# Altium PCB XPCAM-C_1V4.PCBDOC (part 1 of 2)
Units mil, origin at the board's own origin, x right, y up, seen from the top; angles counter-clockwise.
Board outline 1696.85 x 1007.87 mil, 6 copper layers (Top Layer, Internal Plane 1, Mid-Layer 1, Internal Plane 2, Mid-Layer 2, Bottom Layer); 49 components, 33 nets, 261 pads, 143 vias.
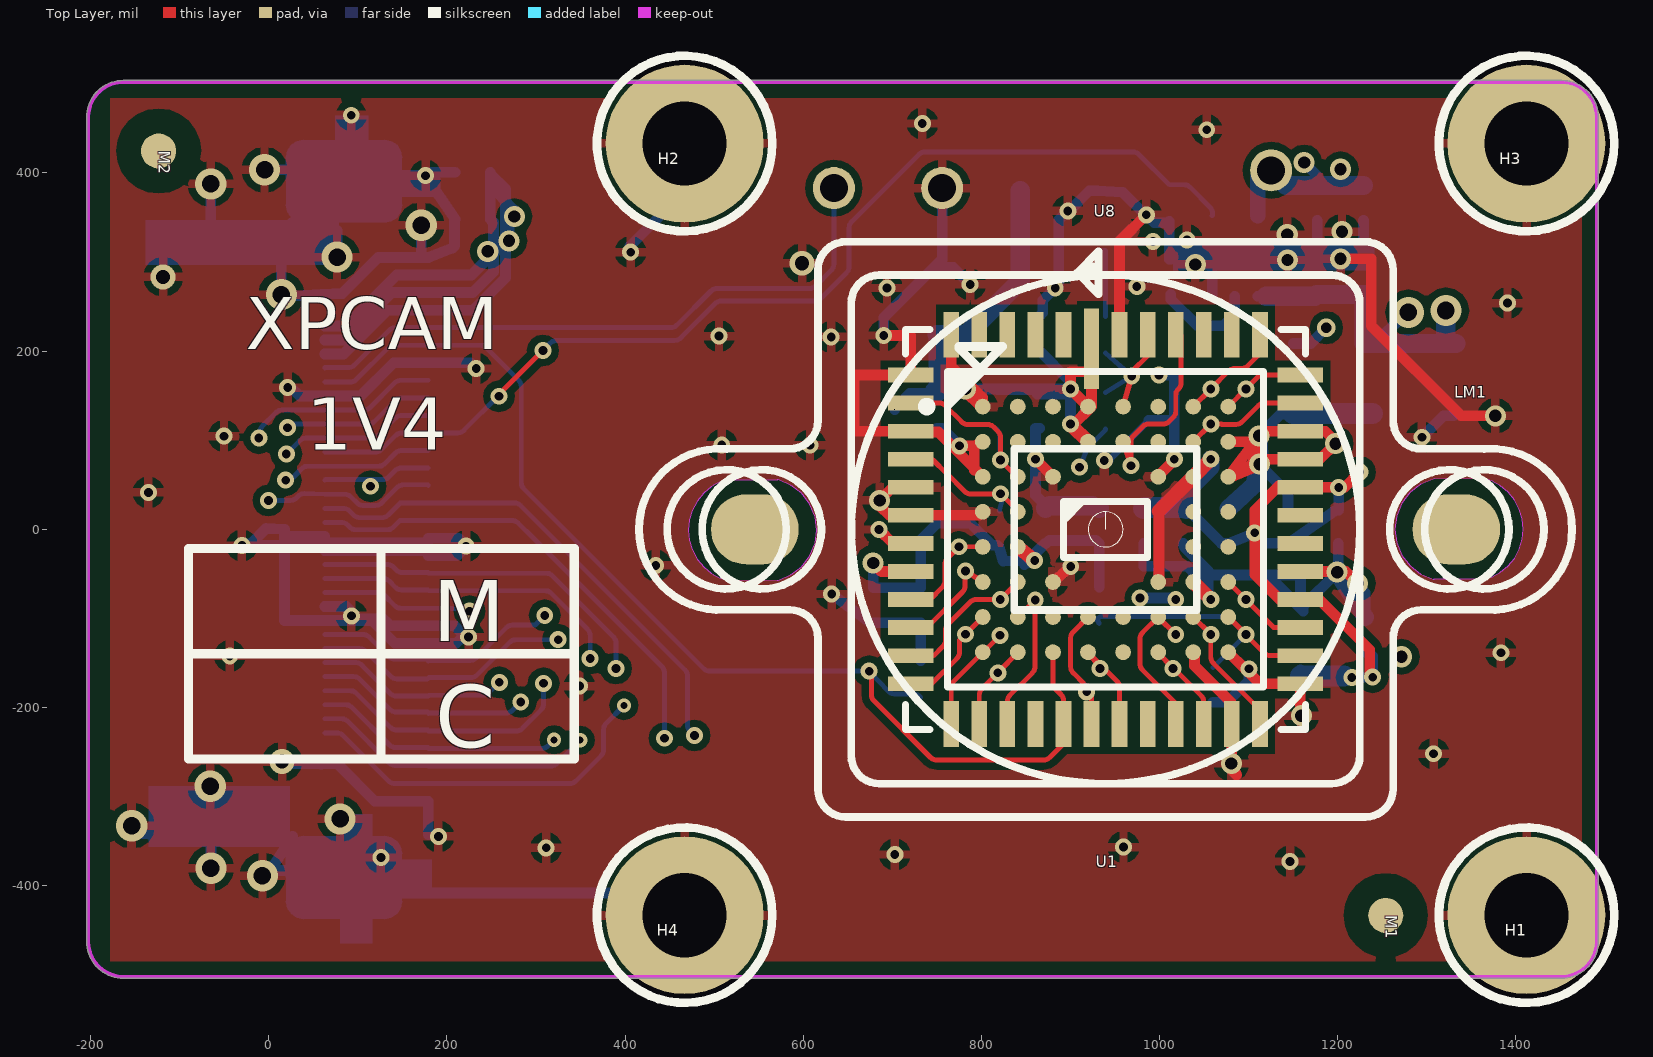
[diagram p0: Top Layer view]
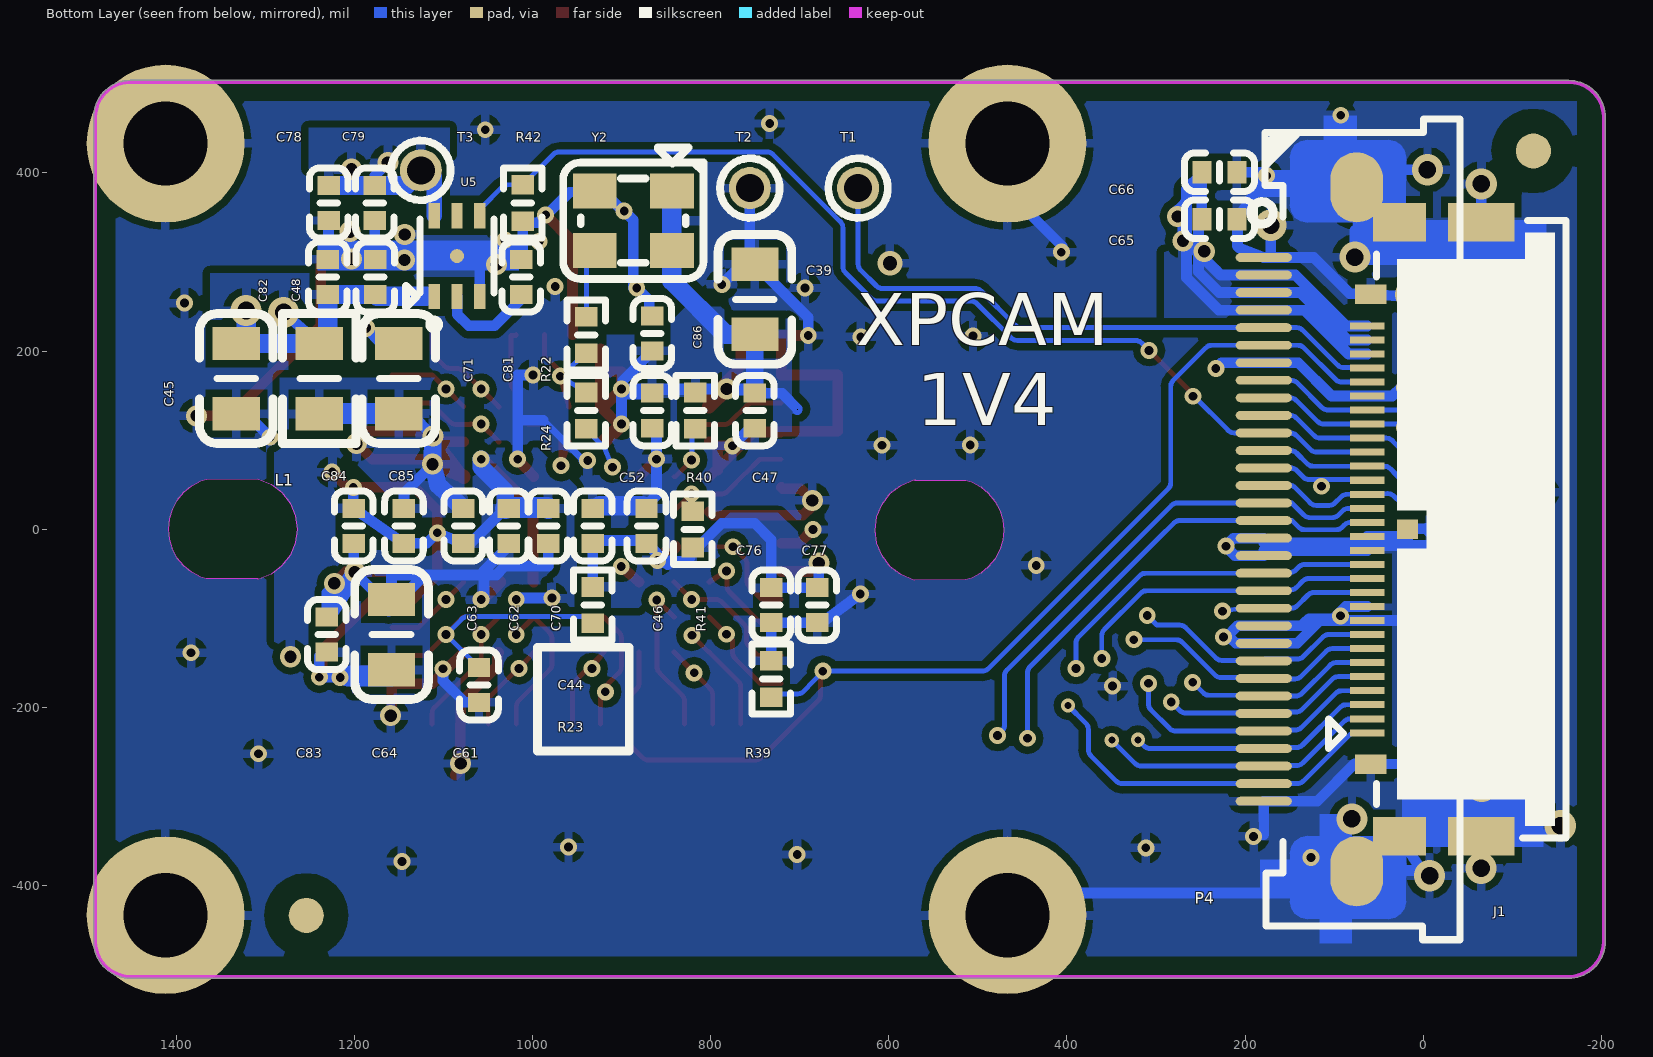
[diagram p1: Bottom Layer view, seen from below]
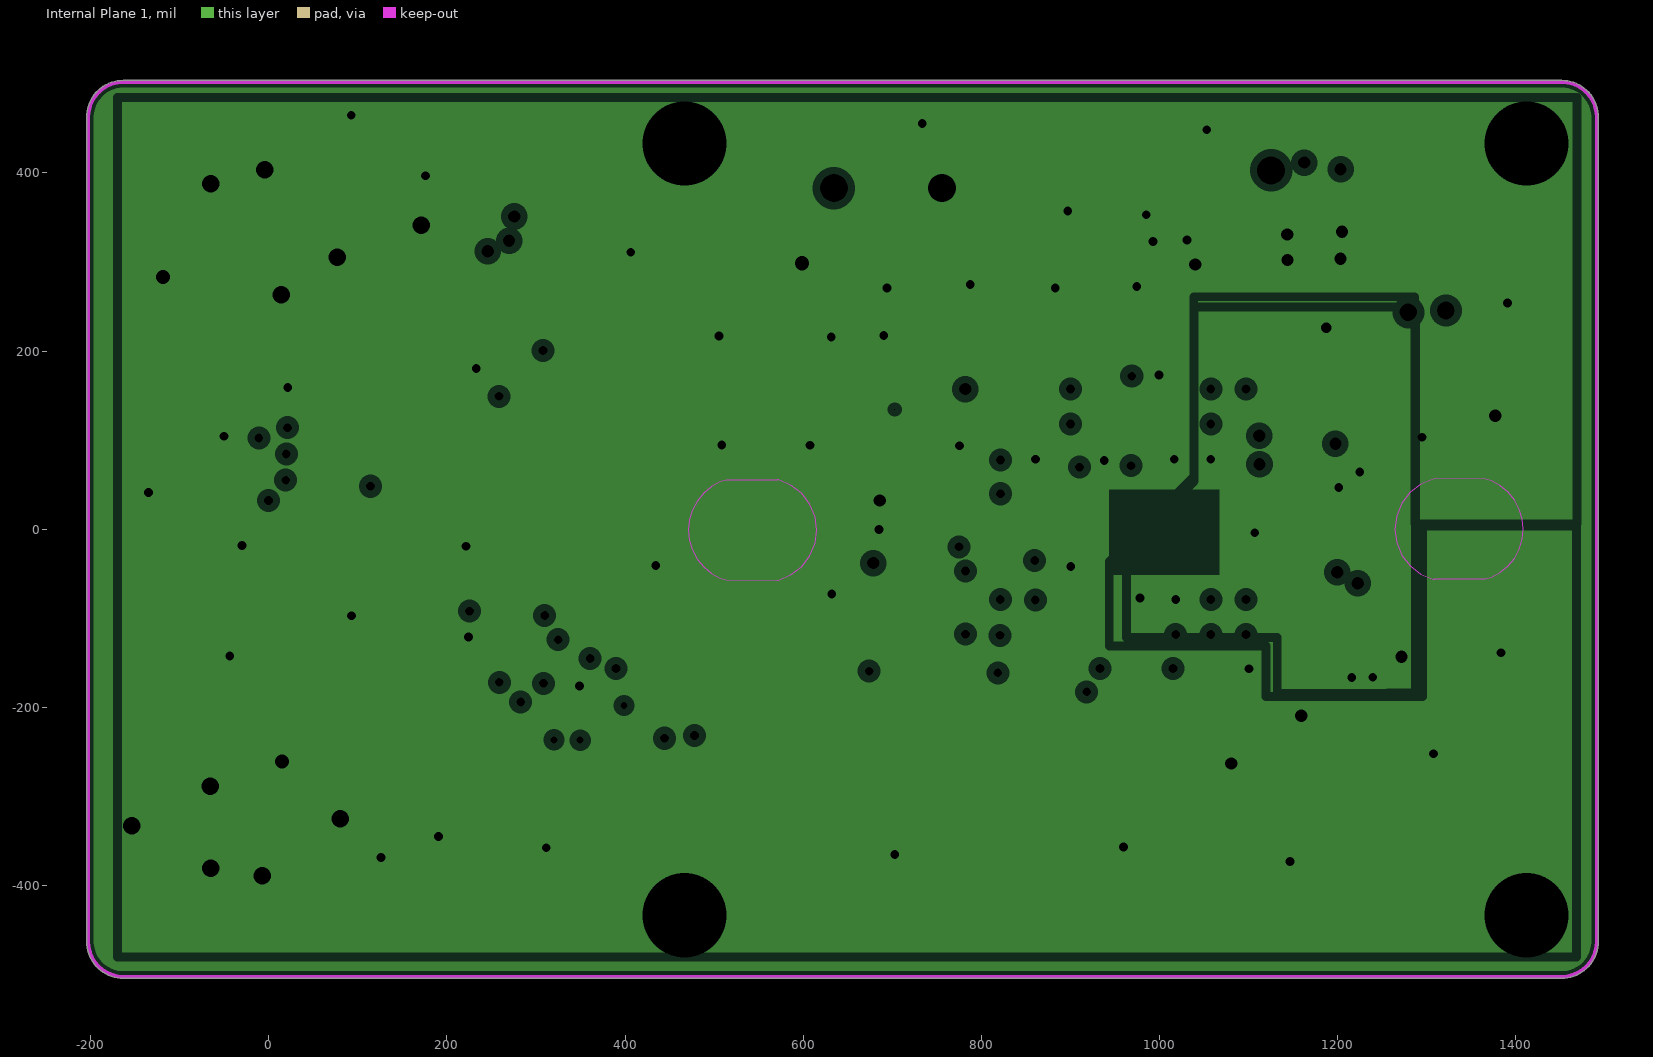
[diagram p2: Internal Plane 1, clearances drawn from the general rule]
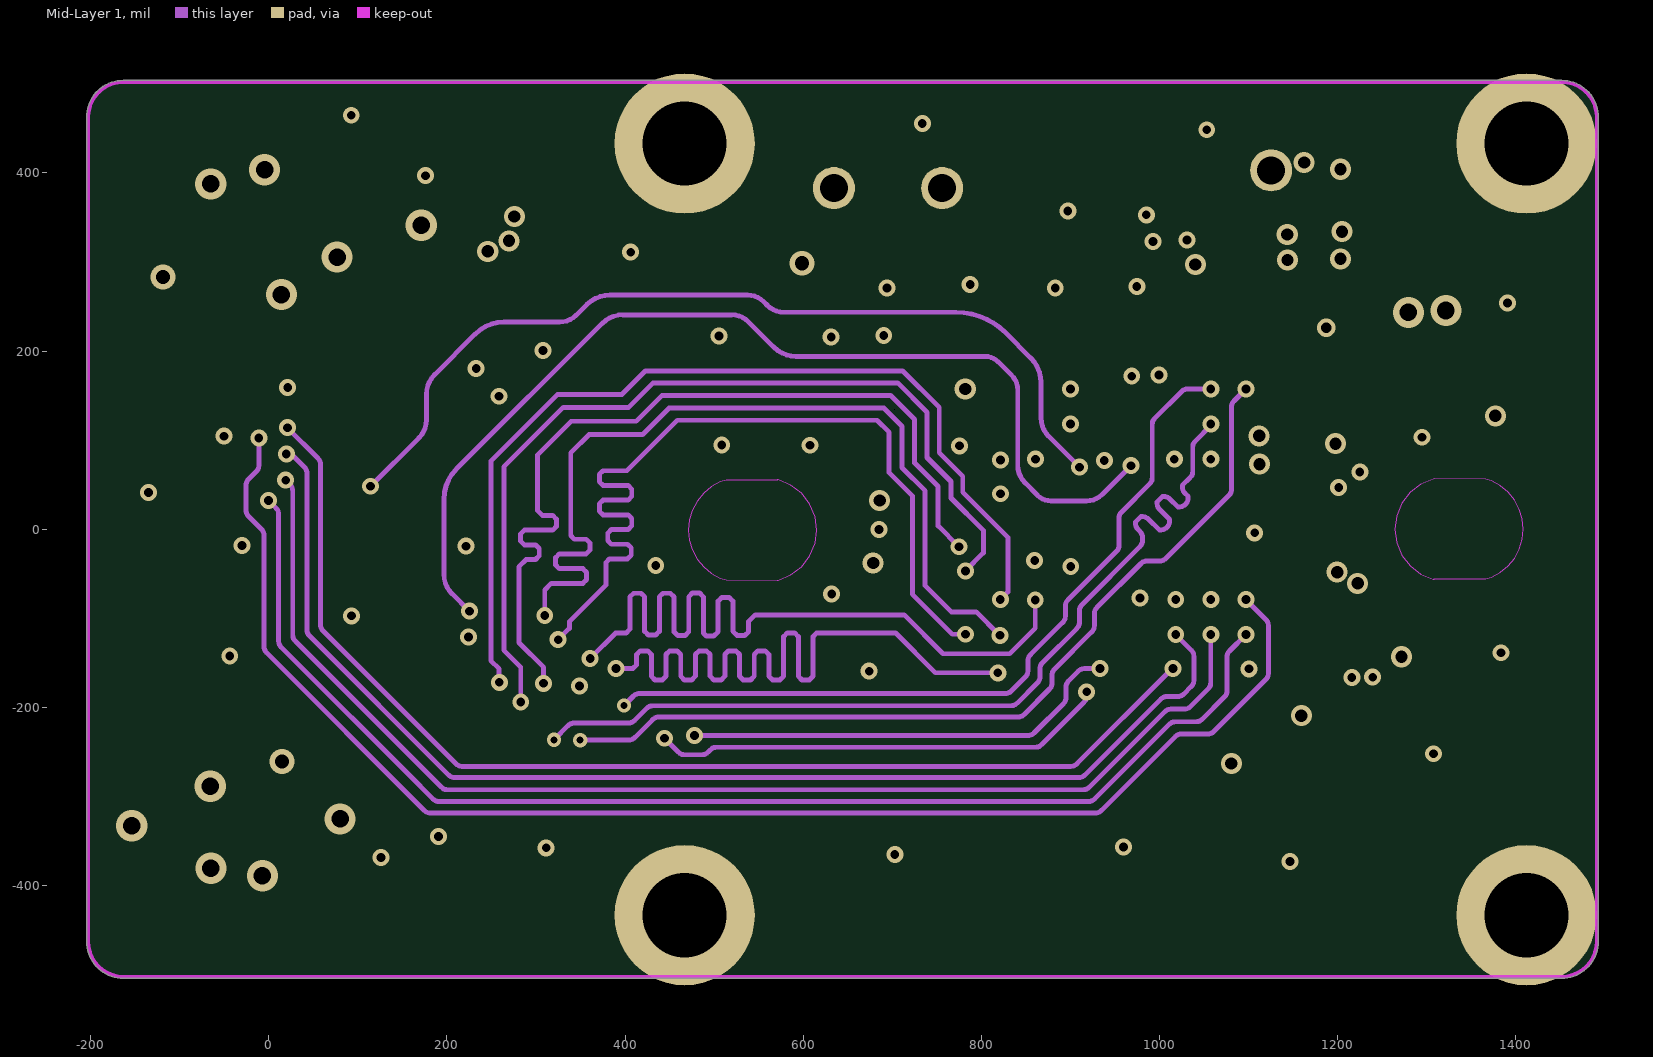
[diagram p3: Mid-Layer 1]
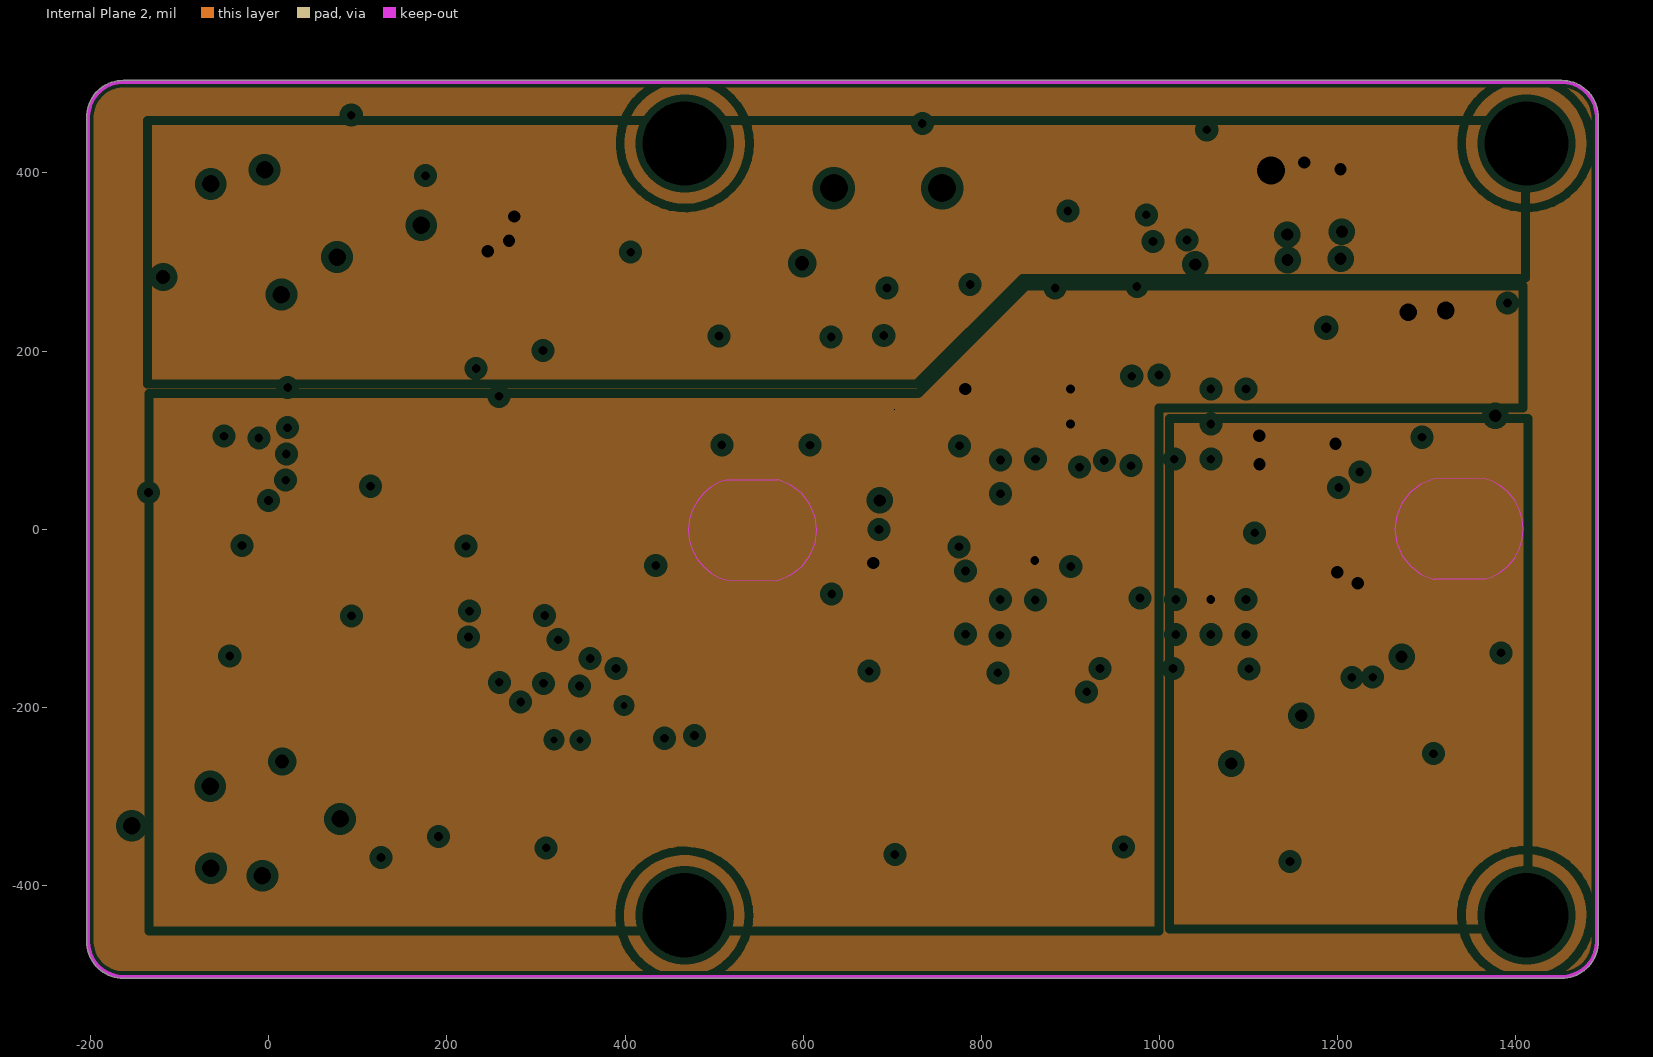
[diagram p4: Internal Plane 2, clearances drawn from the general rule]
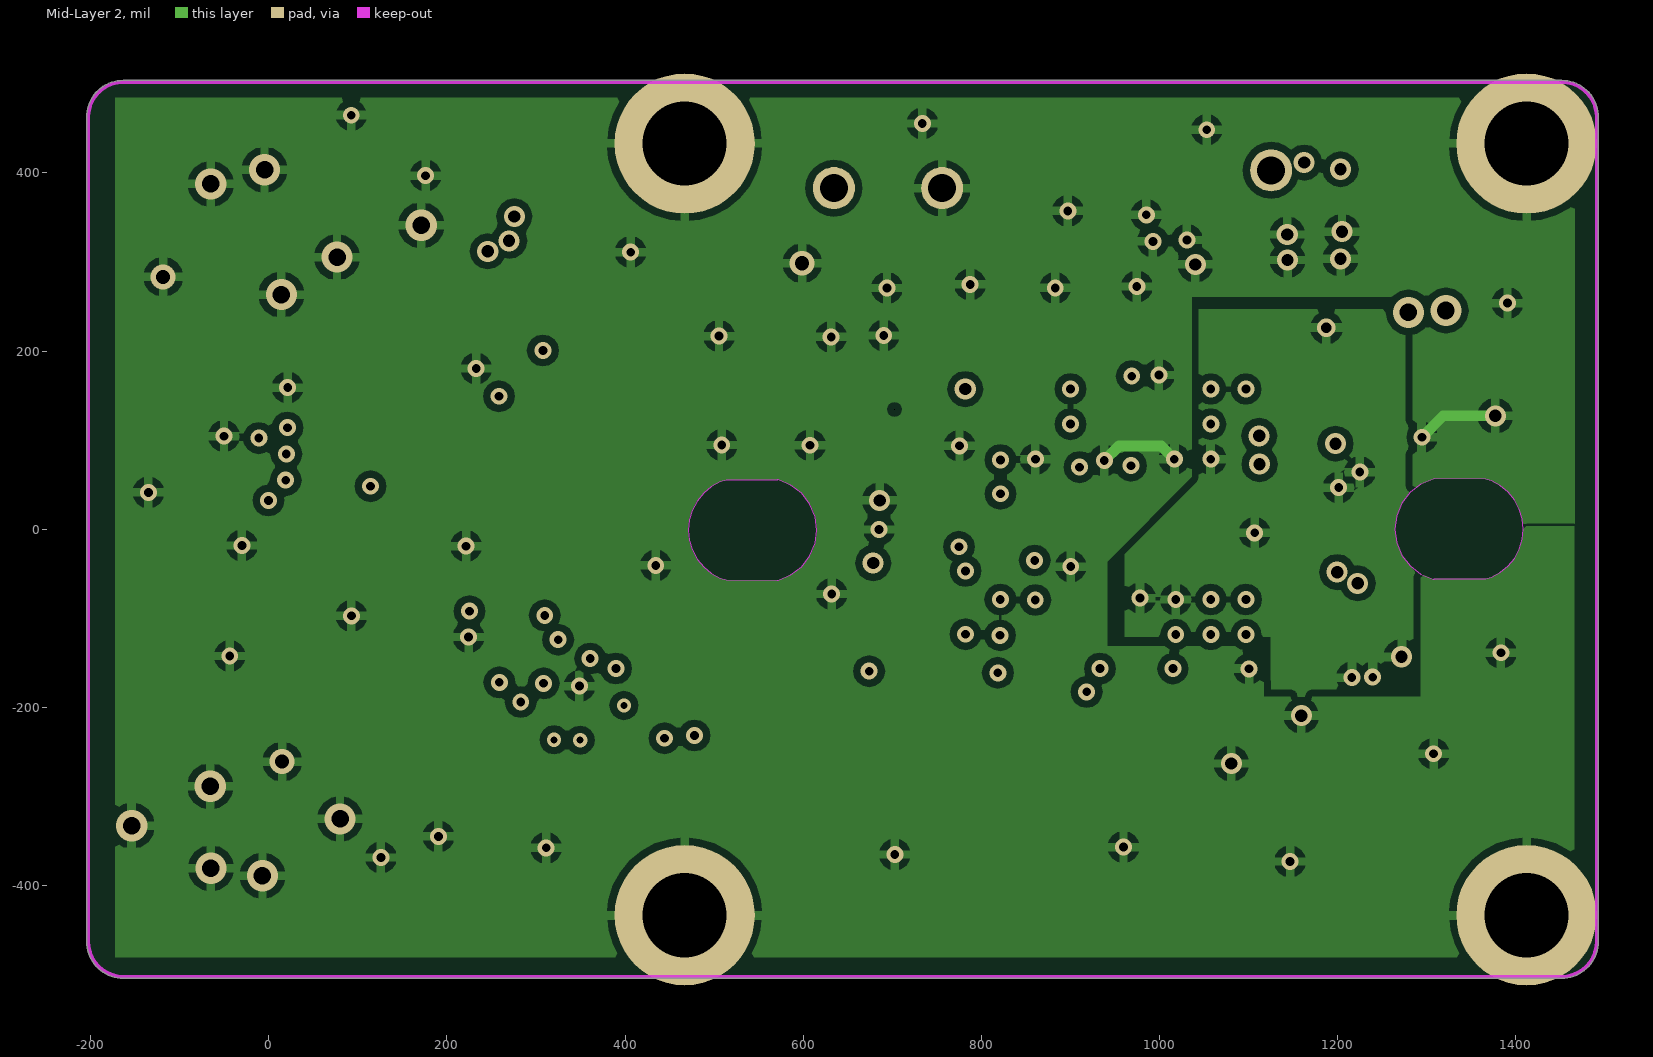
[diagram p5: Mid-Layer 2]

## Layer stack, top to bottom
Top Layer: signal copper 1.4
Dielectric: dielectric 12.6, FR-4, Dk 4.8
Internal Plane 1: plane copper 1.4, net (Multiple Nets)
Dielectric: dielectric 12.6, FR-4, Dk 4.8
Mid-Layer 1: signal copper 1.4
Dielectric: dielectric 12.6, FR-4, Dk 4.8
Internal Plane 2: plane copper 1.4, net (Multiple Nets)
Dielectric: dielectric 12.6, FR-4, Dk 4.8
Mid-Layer 2: signal copper 1.4
Dielectric: dielectric 12.6, FR-4, Dk 4.8
Bottom Layer: signal copper 1.4

## Board outline
-204.32,-462.6 ccw(c-162.98,-462.6) -162.98,-503.94 1451.19,-503.94 ccw(c1451.19,-462.6) 1492.53,-462.6 1492.53,462.6 ccw(c1451.19,462.6) 1451.19,503.94 -162.96,503.94 -162.98,503.94 ccw(c-162.98,462.6) -204.32,462.6

## Design rules (kind name [scope] priority, off if disabled: settings)
Clearance "'Default' PADS rule_9" [All] p1: gap=8
Clearance "'Default' PADS rule_8" [InPolygon vs InPolygon] p2: gap=8
Clearance "'Default' PADS rule_7" [All] p3: gap=5.5
Clearance "'Default' PADS rule_4" [IsVia vs IsVia] p4: gap=6
ComponentClearance "'Default' PADS rule" [All] p1: gap=10 collisioncheckmode=3 verticalgap=10 showdistances=FALSE
PlaneClearance "'Default' PADS rule_3" [All] p1: clearance=8
PlaneConnect "Power Plane Connect Style - pads with no thermal" [(Name='J1-31') Or (Name='J1-32') Or (Name='M1-1') Or (Name='M2-1')] p1: planeconnectstyle=NoConnect reliefexpansion=20 reliefentries=4 reliefconductorwidth=10 reliefairgap=10 // PAD - No Thermal Connect Rule
PlaneConnect "Power Plane Connect Style - from global settings" [All] p2: planeconnectstyle=Relief reliefexpansion=20 reliefentries=2 reliefconductorwidth=11.81 reliefairgap=10
PolygonConnect [All] p1: connectstyle=Relief reliefconductorwidth=10 reliefentries=4 polygonreliefangle="90 Angle"
RoutingVias [All] p1: holewidth=28 width=50 viastyle="Through Hole" minholewidth=28 minwidth=50 maxholewidth=28 maxwidth=50
SMDToCorner "'Default' PADS rule_5" [All] p1: distance=60000
SMDToPlane "'Default' PADS rule_6" [All] p1: distance=60000
SilkscreenOverComponentPads [All] p1: minsilkscreentomaskgap=10
SolderMaskExpansion [All] p1: expansion=4
Width "'Default' PADS rule_2" [All] p1: maxlimit=250 minlimit=5 preferedwidth=5.6
24 further rules are at their usual default settings.

## Components (designator, comment, footprint, x,y, rotation, side; value= is the part's Value field where it differs from the comment)
C39 "0805C" 0805C 750.25,258.19 r270 bottom
C44 "0402C_L" 0402C_L 932.28,3.87 r270 bottom
C45 "0805C" 0805C 1332.36,169.29 r90 bottom
C46 "0402C_L" 0402C_L 871.95,3.87 r270 bottom
C47 "0402C_L" 0402C_L 750.25,133.2 r90 bottom
C48 "0402C_L" 0402C_L 1176.24,283.34 r270 bottom
C52 "0402C_L" 0402C_L 865.38,133.2 r90 bottom
C61 "0402C_L" 0402C_L 1059.99,-174.53 r90 bottom
C62 "0402C_L" 0402C_L 1026.67,3.82 r270 bottom
C63 "0402C_L" 0402C_L 1077.5,3.82 r90 bottom
C64 "0805C" 0805C 1158.14,-118.11 r90 bottom
C65 "0402C_L" 0402C_L 228.95,348.23 r0 bottom
C66 "0402C_L" 0402C_L 228.95,400.96 r0 bottom
C70 "0402C_L" 0402C_L 982.27,3.82 r270 bottom
C71 "0805C" 0805C 1150.01,169.29 r270 bottom
C76 "0402C_L" 0402C_L 731.88,-85.1 r270 bottom
C77 "0402C_L" 0402C_L 680.46,-85.1 r90 bottom
C78 "0402C_L" 0402C_L 1228.82,366.31 r90 bottom
C79 "0402C_L" 0402C_L 1177.06,366.31 r90 bottom
C81 "0402C_L" 0402C_L 1012.72,283.34 r270 bottom
C82 "0402C_L" 0402C_L 1229.64,283.34 r270 bottom
C83 "0402C_L" 0402C_L 1230.87,-118.11 r90 bottom
C84 "0402C_L" 0402C_L 1200.69,3.82 r270 bottom
C85 "0402C_L" 0402C_L 1144.2,3.82 r90 bottom
C86 "0402C_L" 0402C_L 865.38,219.88 r270 bottom
H1 "PAD_M3_D350_450" PAD_M3_D350_450 1411.82,-433.07 r0 top
H2 "PAD_M3_D350_450" PAD_M3_D350_450 466.94,433.07 r0 top
H3 "PAD_M3_D350_450" PAD_M3_D350_450 1411.82,433.07 r0 top
H4 "PAD_M3_D350_450" PAD_M3_D350_450 466.94,-433.07 r0 top
J1 "HSA30_P40L196W42H10_20525" HSA30_P40L196W42H10_20525 0,0 r90 bottom
L1 "0805R" 0805R 1239.21,169.29 r270 bottom
LM1 "LEMS_P20_M12" LEMS_P20_M12 939.38,0 r0 top
M1 "PAD_MARK_D1-2" PAD_MARK_D1-2 1253.84,-433.37 r270 top
M2 "PAD_MARK_D1-2" PAD_MARK_D1-2 -123.48,424.68 r270 top
P4 "HS32A_FPC_P50L2350W480H210" HS32A_FPC_P50L2350W480H210 157.48,0 r90 bottom
R22 "0402R_L" 0402R_L 939.38,218.21 r90 bottom
R23 "0402R_L" 0402R_L 932.28,-85.1 r90 bottom
R24 "0402R_L" 0402R_L 939.38,133.2 r270 bottom
R39 "0402R_L" 0402R_L 731.88,-168.1 r90 bottom
R40 "0402R_L" 0402R_L 817.28,133.2 r90 bottom
R41 "0402R_L" 0402R_L 820.15,0.05 r270 bottom
R42 "0402R_L" 0402R_L 1010.86,366.31 r90 bottom
T1 "PAD_TP_D1.2" PAD_TP_D1.2 634.44,383.03 r180 bottom
T2 "PAD_TP_D1.2" PAD_TP_D1.2 755.95,383.03 r180 bottom
T3 "PAD_TP_D1.2" PAD_TP_D1.2 1125.24,402.95 r180 bottom
U1 "IBGA52_8X8_P100L90W90H90R" IBGA52_8X8_P100L90W90H90R 939.38,0 r0 top
U5 "SON6_P65L21W21H8_DRV" SON6_P65L21W21H8_DRV 1084.64,306.77 r90 bottom
U8 "CLCC48_P80L114W114H23" CLCC48_P80L114W114H23 939.38,0 r0 top
Y2 "XTAL_3225" XTAL_3225 886.81,346.46 r0 bottom

## Footprints (in the part's own frame and the unit in brackets; to place one, negate y for a bottom-side part, rotate by r counter-clockwise, add the part's x,y. Pads: shape width x height; smd on the part's side, far side on the other; paste and mask are expansions set on the pad)
0402C_L [mm]
  rect 0.54x0.64 smd: 1(-0.5,0) 2(0.5,0)
  silkscreen extent -1,-0.55 1,0.55
0402R_L [mm]
  rect 0.56x0.64 smd: 1(-0.52,0) 2(0.52,0)
  silkscreen extent -1,-0.55 1,0.55
0805C [mm]
  rect 0.95x1.35 smd: 1(-1,0) 2(1,0)
  silkscreen extent -1.85,-1.05 1.85,1.05
0805R [mm]
  rect 0.95x1.35 smd: 1(-1,0) 2(1,0)
  silkscreen extent -1.85,-1.05 1.85,1.05
CLCC48_P80L114W114H23 [mm]
  rect 0.42x2.3 smd: 1(-0.4,5.15)
  rect 0.45x1.3 smd paste-0.015: 2(-1.2,5.55) 3(-2,5.55) 4(-2.8,5.55) 5(-3.6,5.55) 6(-4.4,5.55) 19(-4.4,-5.55) 20(-3.6,-5.55) 21(-2.8,-5.55) 22(-2,-5.55) 23(-1.2,-5.55) 24(-0.4,-5.55) 25(0.4,-5.55) 26(1.2,-5.55) 27(2,-5.55) 28(2.8,-5.55) 29(3.6,-5.55) 30(4.4,-5.55) 43(4.4,5.55) 44(3.6,5.55) 45(2.8,5.55) 46(2,5.55) 47(1.2,5.55) 48(0.4,5.55)
  rect 1.3x0.42 smd: 7(-5.55,4.4) 8(-5.55,3.6) 9(-5.55,2.8) 10(-5.55,2) 11(-5.55,1.2) 12(-5.55,0.4) 13(-5.55,-0.4) 14(-5.55,-1.2) 15(-5.55,-2) 16(-5.55,-2.8) 17(-5.55,-3.6) 18(-5.55,-4.4) 31(5.55,-4.4) 32(5.55,-3.6) 33(5.55,-2.8) 34(5.55,-2) 35(5.55,-1.2) 36(5.55,-0.4) 37(5.55,0.4) 38(5.55,1.2) 39(5.55,2) 40(5.55,2.8) 41(5.55,3.6) 42(5.55,4.4)
  silkscreen extent -5.7,-5.7 5.7,7.92
HS32A_FPC_P50L2350W480H210 [mm]
  oval 0.254x1.6 smd: 1(7.75,0.55) 2(7.25,0.55) 3(6.75,0.55) 4(6.25,0.55) 5(5.75,0.55) 6(5.25,0.55) 7(4.75,0.55) 8(4.25,0.55) 9(3.75,0.55) 10(3.25,0.55) 11(2.75,0.55) 12(2.25,0.55) 13(1.75,0.55) 14(1.25,0.55) 15(0.75,0.55) 16(0.25,0.55) 17(-0.25,0.55) 18(-0.75,0.55) 19(-1.25,0.55) 20(-1.75,0.55) 21(-2.25,0.55) 22(-2.75,0.55) 23(-3.25,0.55) 24(-3.75,0.55) 25(-4.25,0.55) 26(-4.75,0.55) 27(-5.25,0.55) 28(-5.75,0.55) 29(-6.25,0.55) 30(-6.75,0.55) 31(-7.25,0.55) 32(-7.75,0.55)
  oval 2x1.5 smd: 33(9.75,-2.1) 34(-9.75,-2.1)
  Top Layer region: 9.25,-0.19 9.055,-0.229 8.89,-0.34 8.779,-0.505 8.74,-0.7 8.75,-0.7 8.74,-3 8.779,-3.195 8.89,-3.36 9.055,-3.471 9.25,-3.51 9.25,-3.5 10.6,-3.51 10.795,-3.471 10.96,-3.36 11.071,-3.195 11.11,-3 11.1,-3 11.11,-0.7 11.071,-0.505 10.96,-0.34 10.795,-0.229 10.6,-0.19 10.6,-0.2 9.25,-0.2
  Top Layer region: -10.6,-0.19 -10.795,-0.229 -10.96,-0.34 -11.071,-0.505 -11.11,-0.7 -11.1,-0.7 -11.11,-3 -11.071,-3.195 -10.96,-3.36 -10.795,-3.471 -10.6,-3.51 -10.6,-3.5 -9.25,-3.51 -9.055,-3.471 -8.89,-3.36 -8.779,-3.195 -8.74,-3 -8.75,-3 -8.74,-0.7 -8.779,-0.505 -8.89,-0.34 -9.055,-0.229 -9.25,-0.19 -9.25,-0.2 -10.6,-0.2
  silkscreen extent -11.7,-5.04 11.7,0.92
HSA30_P40L196W42H10_20525 [mm]
  rect 0.2x0.98 smd: 1(-5.8,1.6) 2(-5.4,1.6) 3(-5,1.6) 4(-4.6,1.6) 5(-4.2,1.6) 6(-3.8,1.6) 7(-3.4,1.6) 8(-3,1.6) 9(-2.6,1.6) 10(-2.2,1.6) 11(-1.8,1.6) 12(-1.4,1.6) 13(-1,1.6) 14(-0.6,1.6) 15(-0.2,1.6) 16(0.2,1.6) 17(0.6,1.6) 18(1,1.6) 19(1.4,1.6) 20(1.8,1.6) 21(2.2,1.6) 22(2.6,1.6) 23(3,1.6) 24(3.4,1.6) 25(3.8,1.6) 26(4.2,1.6) 27(4.6,1.6) 28(5,1.6) 29(5.4,1.6) 30(5.8,1.6)
  round 0 all layers, no hole: 31(-7.45,0) 32(7.45,0)
  rect 1.1x1.5 smd: 33(-8.75,0.68) 34(8.75,0.68)
  rect 1.1x1.9 smd: 35(8.75,-1.65) 36(-8.75,-1.65)
  rect 0.55x0.9 smd: 37(-6.7,1.5) 38(6.7,1.5)
  rect 0.55x0.6 smd: 39(0,0.45)
  silkscreen extent -8.8,-4.07 8.8,2.7
IBGA52_8X8_P100L90W90H90R [mm]
  round 0.45 smd: A1(-3.5,3.5) A2(-2.5,3.5) A3(-1.5,3.5) A4(-0.5,3.5) A5(0.5,3.5) A6(1.5,3.5) A7(2.5,3.5) A8(3.5,3.5) B1(-3.5,2.5) B2(-2.5,2.5) B3(-1.5,2.5) B4(-0.5,2.5) B5(0.5,2.5) B6(1.5,2.5) B7(2.5,2.5) B8(3.5,2.5) C1(-3.5,1.5) C2(-2.5,1.5) C3(-1.5,1.5) C6(1.5,1.5) C7(2.5,1.5) C8(3.5,1.5) D1(-3.5,0.5) D2(-2.5,0.5) D7(2.5,0.5) D8(3.5,0.5) E1(-3.5,-0.5) E2(-2.5,-0.5) E7(2.5,-0.5) E8(3.5,-0.5) F1(-3.5,-1.5) F2(-2.5,-1.5) F3(-1.5,-1.5) F6(1.5,-1.5) F7(2.5,-1.5) F8(3.5,-1.5) G1(-3.5,-2.5) G2(-2.5,-2.5) G3(-1.5,-2.5) G4(-0.5,-2.5) G5(0.5,-2.5) G6(1.5,-2.5) G7(2.5,-2.5) G8(3.5,-2.5) H1(-3.5,-3.5) H2(-2.5,-3.5) H3(-1.5,-3.5) H4(-0.5,-3.5) H5(0.5,-3.5) H6(1.5,-3.5) H7(2.5,-3.5) H8(3.5,-3.5)
  silkscreen extent -5.22,-4.5 4.5,4.5
LEMS_P20_M12 [mm]
  oval 2.5x2 smd: 1(-10,0) 2(10,0)
  silkscreen extent -13.3,-8.2 13.3,8.2
PAD_M3_D350_450 [mm]
  round 4.5 / inner round 4 / far side round 4.5 hole 2.4 unplated: 1(0,0)
  silkscreen extent -2.5,-2.5 2.5,2.5
PAD_MARK_D1-2 [mm]
  round 1 / inner round 0 / far side round 1 all layers, no hole mask+0.5: 1(0,0)
  Top Layer pour cut-out: 1.009,0 0.974,0.261 0.873,0.504 0.713,0.713 0.504,0.873 0.261,0.974 0,1.009 -0.261,0.974 -0.504,0.873 -0.713,0.713 -0.873,0.504 -0.974,0.261 -1.009,0 -0.974,-0.261 -0.873,-0.504 -0.713,-0.713 -0.504,-0.873 -0.261,-0.974 0,-1.009 0.261,-0.974 0.504,-0.873 0.713,-0.713 0.873,-0.504 0.974,-0.261 1.009,0
  Top Layer pour cut-out: 1.21,0 1.169,0.313 1.048,0.605 0.856,0.856 0.605,1.048 0.313,1.169 0,1.21 -0.313,1.169 -0.605,1.048 -0.856,0.856 -1.048,0.605 -1.169,0.313 -1.21,0 -1.169,-0.313 -1.048,-0.605 -0.856,-0.856 -0.605,-1.048 -0.313,-1.169 0,-1.21 0.313,-1.169 0.605,-1.048 0.856,-0.856 1.048,-0.605 1.169,-0.313 1.21,0
  Bottom Layer pour cut-out: 1.009,0 0.974,0.261 0.873,0.504 0.713,0.713 0.504,0.873 0.261,0.974 0,1.009 -0.261,0.974 -0.504,0.873 -0.713,0.713 -0.873,0.504 -0.974,0.261 -1.009,0 -0.974,-0.261 -0.873,-0.504 -0.713,-0.713 -0.504,-0.873 -0.261,-0.974 0,-1.009 0.261,-0.974 0.504,-0.873 0.713,-0.713 0.873,-0.504 0.974,-0.261 1.009,0
  Bottom Layer pour cut-out: 1.21,0 1.169,0.313 1.048,0.605 0.856,0.856 0.605,1.048 0.313,1.169 0,1.21 -0.313,1.169 -0.605,1.048 -0.856,0.856 -1.048,0.605 -1.169,0.313 -1.21,0 -1.169,-0.313 -1.048,-0.605 -0.856,-0.856 -0.605,-1.048 -0.313,-1.169 0,-1.21 0.313,-1.169 0.605,-1.048 0.856,-0.856 1.048,-0.605 1.169,-0.313 1.21,0
PAD_TP_D1.2 [mm]
  round 1.2 hole 0.8: 1(0,0)
  silkscreen extent -0.85,-0.85 0.85,0.85
SON6_P65L21W21H8_DRV [mm]
  rect 0.72x0.32 smd: 1(-1.15,0.65) 2(-1.15,0) 3(-1.15,-0.65) 4(1.15,-0.65) 5(1.15,0) 6(1.15,0.65)
  round 0.4 smd: 7(0,0)
  Top Layer region: -0.4,0.6 -0.2,0.8 0.2,0.804 0.278,0.788 0.344,0.744 0.388,0.678 0.404,0.6 0.4,0.6 0.404,-0.6 0.388,-0.678 0.344,-0.744 0.278,-0.788 0.2,-0.804 0.2,-0.8 -0.2,-0.804 -0.278,-0.788 -0.344,-0.744 -0.388,-0.678 -0.404,-0.6 -0.4,-0.6 -0.4,0.6
  silkscreen extent -2.07,-1.05 1.05,1.45
XTAL_3225 [mm]
  rect 1.25x1 smd: 1(-1.1,-0.85) 2(1.1,-0.85) 3(1.1,0.85) 4(-1.1,0.85)
  silkscreen extent -2,-2.08 2,1.66

## Via types
v1: diameter 19, hole 9.84, Top Layer to Bottom Layer, 101 vias
v2: diameter 23.62, hole 13.78, Top Layer to Bottom Layer, 22 vias
v3: diameter 35, hole 19.68, Top Layer to Bottom Layer, 12 vias
v4: diameter 16, hole 7.87, Top Layer to Bottom Layer, 3 vias
v5: diameter 27.95, hole 15.75, Top Layer to Bottom Layer, 3 vias
v6: diameter 20.47, hole 11.81, Top Layer to Bottom Layer, 1 vias
v7: diameter 0, hole 0, Top Layer to Bottom Layer, 1 vias

## Nets (pads, with @x,y where several pads share a name; then routed paths per layer and width w, separated by ;. In a path a pad name is that pad's centre, name@x,y a point inside that pad or via, vN(x,y) a via of type N, cw(c..) or ccw(c..) an arc to the next point about the centre after c; other vN are vias at no path point)
5V0: C65.2 C66.2 C78.2 C79.2 J1.28 J1.29 J1.30 P4.2 P4.3 P4.4 T3.1 U5.6 | length 1264.6
  Bottom Layer w12: J1.28@62.99,196.85 84.11,196.85 133.33,246.07 P4.4@179.13,246.07 229.5,246.07 265.77,282.34 265.77,381.99 248.64,399.13 C66.2@248.64,400.96 ; J1.29@62.99,212.6 85.16,212.6 138.31,265.75 P4.3@179.13,265.75 228.96,265.75 252.4,289.19 252.4,344.76 250.41,346.75 250.12,346.75 C65.2@248.64,348.23 C66.2@248.64,400.96 ; J1.30@62.99,228.35 86.57,228.35 143.66,285.44 P4.2@179.13,285.44 ; v2(1162.24,411.68) 1177.06,396.87 C79.2@1177.06,386 ; P4.2@179.13,285.44 177.35,285.59 172.85,285.59 173.01,285.44 P4.2@179.13,285.44 ; P4.2@179.13,285.44 227.65,285.44 248.41,306.19 248.41,309.62 v2(245.92,312.11) 255.62,312.48 272.66,323.79 v2(269.89,323.79) 269.89,350.02 v2(275.73,351.17) 275.73,358.36 248.64,386.01 C66.2@248.64,400.96
  Bottom Layer w17.72: U5.6@1110.24,352.04 1110.24,395.85 T3.1@1125.24,402.95
  Bottom Layer w21.65: T3.1@1125.24,402.95 1142.19,386 C79.2@1177.06,386 C78.2@1228.82,386
  other v2: 1203.15,404.22
$$$1: 
ADDR_CTL: J1.20 P4.12 U1.G7 U8.30 | length 1707.5
  Top Layer w5.5: v1(1057.49,-118.11) 1057.49,-143.32 ccw(c1067.12,-143.32) 1060.31,-150.13 1109.79,-199.61 cw(c1102.99,-206.41) 1112.61,-206.41 U8.30@1112.61,-218.5
  Top Layer w6: U1.G7@1037.81,-98.43 v1(1057.49,-118.11)
  Mid-Layer 1 w5.5: v1(19.15,55.22) 24.21,50.17 cw(c17.4,43.36) 27.02,43.36 27.02,-118.54 ccw(c36.65,-118.54) 29.84,-125.34 194,-289.5 ccw(c200.8,-282.69) 200.8,-292.32 914.19,-292.32 ccw(c914.19,-282.69) 921,-289.5 1005.86,-204.63 cw(c1012.67,-211.44) 1012.67,-201.82 1027.84,-201.82 ccw(c1027.84,-192.19) 1034.65,-199 1054.67,-178.97 ccw(c1047.87,-172.17) 1057.49,-172.17 v1(1057.49,-118.11)
  Bottom Layer w5.5: v1(19.15,55.22) 20.43,55.22 ccw(c20.43,64.84) 27.33,58.13 30.11,60.98 36.93,67.97 cw(c43.81,61.24) 43.81,70.87 J1.20@62.99,70.87 123.55,70.87 ccw(c123.55,80.49) 130.36,73.69 142.43,85.76 cw(c149.24,78.95) 149.24,88.58 P4.12@179.13,88.58
AGND: C62.1 C63.1 C64.1 C70.1 C71.1 C83.1 C84.1 C85.1 U1.C7 U1.F6 U8.34 U8.38 | length 1127.2
  Top Layer w12: U1.F6@998.44,-59.06 999.25,-58.24 999.25,20.5 ; v1(1201,46.92) v1@1200.68,47.24 ; v1(1224.81,64.28) 1207.78,47.24 v1@1200.68,47.24 ; v1(1239.15,-165.91) 1235.82,-162.58 1235.82,-135.25 1179.31,-78.74 U8.34@1157.89,-78.74 1134.88,-78.74 1106.75,-50.6 v1(1106.75,-3.88) 1106.75,21.48 1133.85,48.58 1156.55,48.58 U8.38@1157.89,47.24 v1@1200.68,47.24
  Top Layer w15.75: 999.25,20.5 U1.C7@1037.81,59.06 v1(1057.49,78.74)
  Bottom Layer w12: v1(978.13,-77.14) 1016.52,-77.14 v1(1018.12,-78.74) ; C62.1@1026.67,23.51 1026.78,23.4 1030.44,23.4 1069.5,-15.66 1069.5,-15.86 C63.1@1077.5,-15.86 v1(1106.75,-3.88) 1118.6,-15.73 1144.08,-15.73 C85.1@1144.2,-15.86 C84.1@1200.69,23.51 1201,21.81 v1(1201,46.92) ; C71.1@1150.01,208.66 1169.66,208.66 v6(1187.21,226.34) ; C64.1@1158.14,-164.63 C64.1@1158.14,-157.48 ; v1@1207.06,-164.63 v1(1215.82,-166.24) 1215.82,-165.91 v1(1239.15,-165.91) 1239.15,-142.29 C83.1@1230.87,-137.8
  Bottom Layer w19.68: C62.1@1030.44,23.4 1030.44,42.75 1057.49,69.8 v1(1057.49,78.74)
  Bottom Layer w23.62: C70.1@982.27,23.51 983.1,24.34 1029.5,24.34 C62.1@1030.44,23.4 ; C64.1@1158.14,-164.63 v1@1207.06,-164.63
  other v2: 1271.64,-142.97
CAM_SCL: J1.17 P4.15 U1.H4 U8.25 | length 1182.7
  Top Layer w5.5: v1(933.05,-156.31) U1.H4@919.7,-137.8 952.1,-170.2 cw(c945.3,-177.01) 954.92,-177.01 954.92,-218.29 U8.25@955.13,-218.5
  Mid-Layer 1 w5.5: v1(477.97,-231.43) 852.26,-231.43 ccw(c852.26,-221.8) 859.06,-228.61 892.23,-195.44 ccw(c885.43,-188.63) 895.05,-188.63 895.05,-176.85 cw(c904.68,-176.85) 897.87,-170.05 908.79,-159.13 cw(c915.6,-165.93) 915.6,-156.31 v1(933.05,-156.31)
  Bottom Layer w5.5: J1.17@62.99,23.62 83.86,23.62 cw(c83.86,14) 90.67,20.8 95.56,15.91 ccw(c102.37,22.71) 102.37,13.09 127.15,13.09 ccw(c127.15,22.71) 133.96,15.91 147.58,29.53 148.54,29.53 P4.15@179.13,29.53 276.18,29.53 cw(c276.18,19.9) 282.99,26.71 467.26,-157.56 cw(c460.45,-164.36) 470.08,-164.36 470.08,-219.55 ccw(c479.7,-219.55) 472.89,-226.35 v1(477.97,-231.43)
CAM_SDA: J1.16 P4.16 U1.G4 U8.24 | length 1208.8
  Top Layer w5.5: U1.G4@919.7,-98.43 902.97,-115.16 ; U8.24@923.63,-218.5 923.63,-183.49 918.6,-182.47 918.52,-182.38 v1(918.19,-182.38) 917.77,-181.96 v1@917.77,-179.79 ; 900.15,-154.2 ccw(c909.77,-154.2) 902.97,-161 ; 900.15,-154.2 ccw(c909.77,-154.2) 902.97,-161 ; 900.15,-154.2 900.15,-121.96 ; 900.15,-121.96 cw(c909.77,-121.96) 902.97,-115.16 ; 900.15,-121.96 cw(c909.77,-121.96) 902.97,-115.16 ; 902.97,-161 914.95,-172.98 ; 914.95,-172.98 cw(c908.14,-179.79) v1@917.77,-179.79 ; 914.95,-172.98 cw(c908.14,-179.79) v1@917.77,-179.79
  Mid-Layer 1 w5.5: v1(444.33,-234.46) 460.08,-250.2 ccw(c466.88,-243.4) 466.88,-253.02 486.3,-253.02 ccw(c486.3,-243.4) 493.1,-250.2 495.94,-247.37 cw(c502.75,-254.17) 502.75,-244.55 860.66,-244.55 ccw(c860.66,-234.92) 867.46,-241.73 915.37,-193.82 ccw(c908.57,-187.02) 918.19,-187.02 v1(918.19,-182.38)
  Bottom Layer w5.5: J1.16@62.99,7.87 81.71,7.87 cw(c81.71,-1.75) 88.52,5.06 91.19,2.38 ccw(c97.99,9.19) 97.99,-0.43 133.07,-0.43 ccw(c133.07,9.19) 139.88,2.38 147.33,9.84 P4.16@179.13,9.84 273.36,9.84 cw(c273.36,0.21) 280.17,7.02 296.14,-8.95 441.54,-154.36 cw(c434.7,-161.13) 444.33,-161.13 v1(444.33,-234.46)
CAMPWR_EN: J1.21 P4.11 R42.2 U5.4 | length 1195.7
  Top Layer w5.5: v1(258.53,149.37) 258.53,151.47 v1(307.82,200.76)
  Bottom Layer w5.5: J1.21@62.99,86.61 119.77,86.61 ccw(c119.77,96.24) 126.58,89.43 142.59,105.45 cw(c149.4,98.65) 149.4,108.27 P4.11@179.13,108.27 212.3,108.27 ccw(c212.3,117.89) 219.1,111.09 257.38,149.37 v1(258.53,149.37) ; v1(307.82,200.76) 316.34,209.27 cw(c323.14,202.47) 323.14,212.09 455.82,212.09 ccw(c455.82,221.72) 462.62,214.91 501.24,253.53 cw(c508.04,246.72) 508.04,256.35 612.87,256.35 ccw(c612.87,265.97) 619.68,259.16 648.76,288.25 ccw(c641.96,295.05) 651.58,295.05 651.58,338.56 cw(c661.21,338.56) 654.4,345.37 729.72,420.68 cw(c736.52,413.88) 736.52,423.5 970.16,423.5 cw(c970.16,413.88) 976.97,420.68 R42.2@1010.86,386.79 1027.44,386.79 cw(c1027.44,377.16) 1034.25,383.97 1056.6,361.61 cw(c1049.8,354.8) 1059.42,354.8 1059.42,352.41 U5.4@1059.05,352.04
CMOS_D0: J1.1 P4.31 U1.A7 U8.43 | length 1417.6
  Top Layer w5.5: v1(1057.49,157.48) 1077.87,177.85 cw(c1084.67,171.05) 1084.67,180.67 1092.14,180.67 ccw(c1092.14,190.3) 1098.95,183.49 1109.79,194.34 ccw(c1102.99,201.14) 1112.61,201.14 U8.43@1112.61,218.5
  Top Layer w6: U1.A7@1037.81,137.8 v1(1057.49,157.48)
  Mid-Layer 1 w5.5: v4(398.81,-197.69) 409.51,-186.98 cw(c416.32,-193.79) 416.32,-184.17 826.95,-184.17 ccw(c826.95,-174.54) 833.75,-181.35 849.33,-165.77 ccw(c842.53,-158.96) 852.15,-158.96 852.15,-147.61 cw(c861.78,-147.61) 854.97,-140.81 891.44,-104.34 ccw(c884.64,-97.53) 894.26,-97.53 894.26,-86.14 cw(c903.89,-86.14) 897.08,-79.34 951.63,-24.78 ccw(c944.83,-17.98) 954.45,-17.98 954.45,12.59 cw(c964.08,12.59) 957.27,19.4 988.94,51.06 ccw(c982.13,57.87) 991.75,57.87 991.75,117.87 cw(c1001.38,117.87) 994.57,124.67 1024.56,154.66 cw(c1031.37,147.86) 1031.37,157.48 v1(1057.49,157.48)
  Bottom Layer w5.5: J1.1@62.99,-228.35 76.53,-228.35 cw(c76.53,-237.97) 83.33,-231.17 134.78,-282.62 ccw(c141.59,-275.81) 141.59,-285.44 P4.31@179.13,-285.44 337.96,-285.44 ccw(c337.96,-275.81) 344.77,-282.62 373.24,-254.15 ccw(c366.43,-247.34) 376.06,-247.34 376.06,-224.43 cw(c385.68,-224.43) 378.87,-217.62 v4(398.81,-197.69)
CMOS_D1: J1.2 P4.30 U1.A8 U8.42 | length 1402.1
  Top Layer w5.5: U1.A8@1077.18,137.8 v1(1096.86,157.48) 1112.61,173.23 U8.42@1157.89,173.23
  Mid-Layer 1 w5.5: v4(349.71,-236.56) 404.01,-236.56 ccw(c404.01,-226.94) 410.82,-233.74 431.04,-213.52 cw(c437.85,-220.32) 437.85,-210.7 841.07,-210.7 ccw(c841.07,-201.07) 847.87,-207.88 876.51,-179.24 ccw(c869.71,-172.43) 879.33,-172.43 879.33,-163.59 cw(c888.96,-163.59) 882.15,-156.78 923.95,-114.98 ccw(c917.14,-108.18) 926.77,-108.18 926.77,-94.57 cw(c936.39,-94.57) 929.59,-87.77 979.1,-38.26 cw(c985.9,-45.06) 985.9,-35.44 1000.36,-35.44 ccw(c1000.36,-25.81) 1007.17,-32.62 1077.88,38.09 ccw(c1071.07,44.89) 1080.7,44.89 1080.7,137.33 cw(c1090.32,137.33) 1083.52,144.13 v1(1096.86,157.48)
  Bottom Layer w5.5: J1.2@62.99,-212.6 81.94,-212.6 cw(c81.94,-222.22) 88.74,-215.42 135.7,-262.38 ccw(c142.51,-255.57) 142.51,-265.2 178.58,-265.2 P4.30@179.13,-265.75 316.53,-265.75 ccw(c316.53,-256.13) 323.34,-262.93 v4(349.71,-236.56)
CMOS_D2: J1.3 P4.29 U1.B7 U8.41 | length 1439.6
  Top Layer w5.5: v1(1057.49,118.11) 1069.63,118.11 1069.85,117.88 1085.9,117.88 ccw(c1085.9,127.51) 1092.71,120.7 1110.92,138.91 cw(c1117.72,132.11) 1117.72,141.73 U8.41@1157.89,141.73
  Top Layer w6: U1.B7@1037.81,98.43 v1(1057.49,118.11)
  Mid-Layer 1 w5.5: v4(320.35,-236.18) 336.45,-220.08 cw(c343.26,-226.89) 343.26,-217.26 404.01,-217.26 ccw(c404.01,-207.64) 410.82,-214.44 424.48,-200.78 cw(c431.29,-207.58) 431.29,-197.96 833.26,-197.96 ccw(c833.26,-188.34) 840.06,-195.14 862.97,-172.24 ccw(c856.16,-165.43) 865.78,-165.43 865.78,-156.4 cw(c875.41,-156.4) 868.6,-149.6 907.41,-110.79 ccw(c900.61,-103.98) 910.23,-103.98 910.23,-91.11 cw(c919.86,-91.11) 913.05,-84.31 977.97,-19.39 ccw(c971.16,-12.58) 980.79,-12.58 980.79,-9.08 ccw(c971.16,-9.08) 977.97,-2.27 975.87,-0.17 cw(c982.68,6.63) 973.05,6.63 973.05,8.48 978.88,14.31 980.73,14.31 cw(c980.73,4.69) 987.54,11.5 999.62,-0.58 1001.46,-0.58 ccw(c1001.46,9.04) 1008.27,2.24 1008.46,2.43 ccw(c1001.66,9.24) 1011.28,9.24 1011.28,11.08 1000.06,22.31 cw(c1006.86,29.12) 997.24,29.12 997.24,30.96 1003.07,36.8 1004.92,36.8 cw(c1004.92,27.17) 1011.72,33.98 1020.39,25.31 1022.24,25.31 ccw(c1022.24,34.93) 1029.05,28.13 1029.24,28.32 ccw(c1022.44,35.13) 1032.06,35.13 1032.06,36.97 1028.36,40.68 cw(c1035.17,47.48) 1025.54,47.48 1025.54,49.33 1034.44,58.22 ccw(c1027.63,65.03) 1037.26,65.03 1037.26,92.3 cw(c1046.88,92.3) 1040.07,99.11 1057.49,116.53 v1(1057.49,118.11)
  Bottom Layer w5.5: J1.3@62.99,-196.85 86.47,-196.85 cw(c86.47,-206.48) 93.28,-199.67 135.61,-242 ccw(c142.41,-235.19) 142.41,-244.82 178.76,-244.82 P4.29@179.13,-246.06 306.48,-246.06 ccw(c306.48,-236.44) 313.29,-243.24 v4(320.35,-236.18)
CMOS_D3: J1.4 P4.28 U1.E1 U8.15 | length 1427.5
  Top Layer w5.5: U8.15@720.88,-78.74 742.32,-78.74 756.27,-64.79 ; U1.E1@801.59,-19.69 v1(774.78,-19.53) 773.83,-20.49 761.91,-32.41 ; 756.27,-64.79 ccw(c749.46,-57.98) 759.09,-57.98 ; 756.27,-64.79 ccw(c749.46,-57.98) 759.09,-57.98 ; 759.09,-57.98 759.09,-39.21 ; 759.09,-39.21 cw(c768.71,-39.21) 761.91,-32.41 ; 759.09,-39.21 cw(c768.71,-39.21) 761.91,-32.41
  Mid-Layer 1 w5.5: v1(308.63,-172.83) 308.63,-154.83 280.85,-127.05 280.85,-41.95 288.93,-33.87 299.56,-33.87 303.69,-29.74 303.69,-21.49 299.56,-17.37 286.93,-17.37 282.8,-13.24 282.8,-4.99 286.93,-0.87 318.83,-0.87 322.96,3.26 322.96,11.51 318.83,15.63 307.17,15.63 301.88,20.92 301.88,83.7 339.52,121.35 412.64,121.35 441.62,150.34 698.05,150.34 724.89,123.49 724.89,74.66 751.41,48.14 751.41,3.84 v1(774.78,-19.53)
  Bottom Layer w5.5: J1.4@62.99,-181.1 91.55,-181.1 ; v1(308.63,-172.83) 308.63,-195.8 cw(c299.01,-195.8) 305.82,-202.61 284.86,-223.56 cw(c278.06,-216.76) 278.06,-226.38 P4.28@179.13,-226.38 178.91,-225.29 143.7,-225.29 ; 91.55,-181.1 cw(c91.55,-190.73) 98.35,-183.92 ; 91.55,-181.1 cw(c91.55,-190.73) 98.35,-183.92 ; 98.35,-183.92 136.9,-222.47 ; 136.9,-222.47 ccw(c143.7,-215.66) 143.7,-225.29 ; 136.9,-222.47 ccw(c143.7,-215.66) 143.7,-225.29
CMOS_D4: J1.5 P4.27 U1.F1 U8.16 | length 1398.4
  Top Layer w5.5: U8.16@720.88,-110.24 738.82,-110.24 778.76,-70.29 ; v1(782.11,-46.64) 781.58,-47.17 781.58,-63.49 ; 778.76,-70.29 ccw(c771.96,-63.49) 781.58,-63.49 ; 778.76,-70.29 ccw(c771.96,-63.49) 781.58,-63.49
  Top Layer w6: v1(782.11,-46.64) U1.F1@801.59,-59.06
  Mid-Layer 1 w5.5: v1(282.94,-193.71) 282.94,-154.6 264.08,-135.74 264.08,70.28 330.72,136.93 404.03,136.93 431.5,164.4 706.02,164.4 739.02,131.4 739.02,80.67 765.92,53.77 765.92,35.2 802.29,-1.17 802.29,-26.47 v1(782.11,-46.64)
  Bottom Layer w5.5: J1.5@62.99,-165.35 95.44,-165.35 ; v1(282.94,-193.71) 273.33,-203.32 cw(c266.52,-196.52) 266.52,-206.14 179.68,-206.14 P4.27@179.13,-206.69 178.52,-205.21 143.28,-205.21 ; 95.44,-165.35 cw(c95.44,-174.98) 102.25,-168.17 ; 95.44,-165.35 cw(c95.44,-174.98) 102.25,-168.17 ; 102.25,-168.17 136.47,-202.39 ; 136.47,-202.39 ccw(c143.28,-195.59) 143.28,-205.21 ; 136.47,-202.39 ccw(c143.28,-195.59) 143.28,-205.21
CMOS_D5: J1.6 P4.26 U1.F2 U8.17 | length 1484.2
  Top Layer w5.5: U8.17@720.88,-141.73 746.4,-141.73 756.91,-131.23 ; U1.F2@840.96,-59.06 v1(821.27,-78.74) 794.28,-78.74 ; 756.91,-131.23 ccw(c750.1,-124.42) 759.72,-124.42 ; 756.91,-131.23 ccw(c750.1,-124.42) 759.72,-124.42 ; 759.72,-124.42 759.72,-113.3 ; 759.73,-113.3 cw(c769.35,-113.3) 762.54,-106.49 ; 759.73,-113.3 cw(c769.35,-113.3) 762.54,-106.49 ; 762.54,-106.49 787.47,-81.56 ; 787.47,-81.56 cw(c794.28,-88.37) 794.28,-78.74 ; 787.47,-81.56 cw(c794.28,-88.37) 794.28,-78.74
  Mid-Layer 1 w5.5: v1(258.97,-171.71) 258.71,-171.71 258.71,-156.65 249.42,-147.36 249.42,76.51 324.39,151.48 396.63,151.48 422.9,177.75 711.76,177.75 752.66,136.85 752.66,86.07 779.13,59.61 779.13,41.81 829.81,-8.87 829.81,-70.21 v1(821.27,-78.74)
  Bottom Layer w5.5: J1.6@62.99,-149.61 97.92,-149.61 ; v1(258.97,-171.71) 247.28,-183.4 cw(c240.47,-176.59) 240.47,-186.22 179.93,-186.22 P4.26@179.13,-187.01 143.3,-187.01 ; 97.92,-149.61 cw(c97.92,-159.23) 104.73,-152.43 ; 97.92,-149.61 cw(c97.92,-159.23) 104.73,-152.43 ; 104.73,-152.43 136.5,-184.19 ; 136.5,-184.19 ccw(c143.3,-177.39) 143.3,-187.01 ; 136.5,-184.19 ccw(c143.3,-177.39) 143.3,-187.01
CMOS_D6: J1.7 P4.25 U1.G1 U8.18 | length 1433.1
  Top Layer w5.5: U8.18@720.88,-173.23 744.05,-173.23 772.72,-144.57 ; U1.G1@801.59,-98.43 801.5,-98.43 v1(782.22,-117.7) 775.53,-124.39 775.53,-125.06 775.53,-137.76 ; 772.72,-144.57 ccw(c765.91,-137.76) 775.53,-137.76 ; 772.72,-144.57 ccw(c765.91,-137.76) 775.53,-137.76
  Mid-Layer 1 w5.5: v1(324.96,-123.85) 337.6,-111.2 337.6,-103.62 378.46,-62.76 378.46,-37.29 382.59,-33.16 402.83,-33.16 406.96,-29.04 406.96,-20.79 402.83,-16.66 384.74,-16.66 380.61,-12.54 380.61,-4.29 384.74,-0.16 403.48,-0.16 407.6,3.96 407.6,12.21 403.48,16.34 375.34,16.34 371.22,20.46 371.22,28.71 375.34,32.84 403.48,32.84 407.6,36.96 407.6,45.21 403.48,49.34 375.34,49.34 371.22,53.46 371.22,61.71 375.34,65.84 402.05,65.84 458.66,122.44 682.84,122.44 696.47,108.81 696.47,63.58 722.5,37.56 722.5,-72.86 767.34,-117.7 v1(782.22,-117.7)
  Bottom Layer w5.5: J1.7@62.99,-133.86 102.11,-133.86 ; v1(324.96,-123.85) 277.49,-123.85 ccw(c277.49,-133.47) 270.68,-126.67 233.67,-163.68 cw(c226.87,-156.87) 226.87,-166.5 179.96,-166.5 P4.25@179.13,-167.32 177.81,-167.78 144,-167.78 ; 102.11,-133.86 cw(c102.11,-143.48) 108.92,-136.68 ; 102.11,-133.86 cw(c102.11,-143.48) 108.92,-136.68 ; 108.92,-136.68 137.2,-164.96 ; 137.2,-164.96 ccw(c144,-158.15) 144,-167.78 ; 137.2,-164.96 ccw(c144,-158.15) 144,-167.78
CMOS_D7: J1.8 P4.24 U1.H1 U8.19 | length 1424.2
  Top Layer w5.5: U8.19@766.15,-218.5 766.15,-177.1 ; v1(820.99,-118.92) 802.12,-137.8 U1.H1@801.59,-137.8 801.48,-137.8 768.97,-170.3 ; 766.15,-177.1 cw(c775.78,-177.1) 768.97,-170.3 ; 766.15,-177.1 cw(c775.78,-177.1) 768.97,-170.3
  Mid-Layer 1 w5.5: v1(309.88,-96.57) 309.88,-68.1 317.41,-60.58 352.64,-60.58 356.76,-56.45 356.76,-48.2 352.64,-44.08 326.25,-44.08 322.13,-39.95 322.13,-31.7 326.25,-27.58 356.36,-27.58 360.49,-23.45 360.49,-15.2 356.36,-11.08 343.19,-11.08 339.07,-6.95 339.07,85.82 359.71,106.45 419.74,106.45 449.33,136.05 690.64,136.05 710.92,115.77 710.92,69.16 736.86,43.23 736.86,-63.16 766.33,-92.63 794.04,-92.63 820.33,-118.92 v1(820.99,-118.92)
  Bottom Layer w5.5: J1.8@62.99,-118.11 106.08,-118.11 ; v1(309.88,-96.57) 298.95,-107.51 273.69,-107.51 ccw(c273.69,-117.13) 266.89,-110.32 232.94,-144.27 cw(c226.14,-137.46) 226.14,-147.09 179.69,-147.09 P4.24@179.13,-147.64 177.86,-145.5 141.45,-145.5 ; 106.08,-118.11 cw(c106.08,-127.74) 112.89,-120.93 ; 106.08,-118.11 cw(c106.08,-127.74) 112.89,-120.93 ; 112.89,-120.93 134.64,-142.68 ; 134.64,-142.68 ccw(c141.45,-135.87) 141.45,-145.5 ; 134.64,-142.68 ccw(c141.45,-135.87) 141.45,-145.5
CMOS_HD: J1.13 P4.19 U1.H2 U8.20 | length 1348.4
  Top Layer w5.5: U8.20@797.65,-218.5 797.65,-185.81 cw(c807.28,-185.81) 800.47,-179 v1(818.48,-160.99)
  Top Layer w6: v1(818.48,-160.99) U1.H2@840.96,-137.8
  Mid-Layer 1 w5.5: v1(389.81,-156.22) 408.89,-156.22 413.01,-152.09 413.01,-140.43 417.14,-136.31 425.39,-136.31 429.51,-140.43 429.51,-164.92 433.64,-169.04 441.89,-169.04 446.01,-164.92 446.01,-140.43 450.14,-136.31 458.39,-136.31 462.51,-140.43 462.51,-164.92 466.64,-169.04 474.89,-169.04 479.01,-164.92 479.01,-140.43 483.14,-136.31 491.39,-136.31 495.51,-140.43 495.51,-164.92 499.64,-169.04 507.89,-169.04 512.01,-164.92 512.01,-140.43 516.14,-136.31 524.39,-136.31 528.51,-140.43 528.51,-164.92 532.64,-169.04 540.89,-169.04 545.01,-164.92 545.01,-140.43 549.14,-136.31 557.39,-136.31 561.51,-140.43 561.51,-164.92 565.64,-169.04 573.89,-169.04 578.01,-164.92 578.01,-120.38 582.14,-116.26 590.39,-116.26 594.51,-120.38 594.51,-164.92 598.64,-169.04 606.89,-169.04 611.01,-164.92 611.01,-120.38 615.14,-116.26 703.63,-116.26 748.37,-160.99 v1(818.48,-160.99)
  Bottom Layer w5.5: J1.13@62.99,-39.37 133.06,-39.37 cw(c133.06,-48.99) 139.87,-42.19 143.3,-45.63 ccw(c150.11,-38.82) 150.11,-48.44 179.03,-48.44 P4.19@179.13,-49.21 311.65,-49.21 cw(c311.65,-58.83) 318.46,-52.03 386.99,-120.57 cw(c380.19,-127.37) 389.81,-127.37 v1(389.81,-156.22)
CMOS_OE: J1.23 P4.9 U1.H6 U8.28 | length 1605.4
  Top Layer w5.5: U1.H6@998.44,-137.8 998.44,-138.5 1046.8,-186.86 cw(c1039.99,-193.66) 1049.62,-193.66 U8.28@1049.62,-218.5
  Top Layer w6: U1.H6@998.44,-137.8 v1(1014.92,-156.29)
  Mid-Layer 1 w5.5: v1(21.05,114.17) 55.36,79.87 cw(c48.55,73.06) 58.17,73.06 58.17,-107 ccw(c67.8,-107) 60.99,-113.8 210.36,-263.17 ccw(c217.16,-256.36) 217.16,-265.98 900.3,-265.98 ccw(c900.3,-256.36) 907.11,-263.17 1009.98,-160.3 cw(c1016.78,-167.11) 1016.78,-157.48 v1(1014.92,-156.29)
  Bottom Layer w5.5: v1(21.05,114.17) 22.17,115.29 cw(c28.97,108.49) 28.97,118.11 J1.23@62.99,118.11 111.78,118.11 ccw(c111.78,127.74) 118.59,120.93 142.48,144.82 cw(c149.28,138.02) 149.28,147.64 P4.9@179.13,147.64
CMOS_PCLK: J1.11 P4.21 U1.B5 U8.46 | length 1543.9
  Top Layer w5.5: v1(967.89,71.46) 967.89,98.44 cw(c977.51,98.44) 970.71,105.25 980.97,115.51 cw(c987.77,108.7) 987.77,118.33 1004.03,118.33 ccw(c1004.03,127.95) 1010.84,121.15 1015.33,125.64 ccw(c1008.52,132.44) 1018.15,132.44 1018.15,150.56 cw(c1027.77,150.56) 1020.96,157.36 1021.2,157.6 ccw(c1014.4,164.41) 1024.02,164.41 1024.02,217.8 1018.12,217.8 U8.46@1018.12,218.5
  Top Layer w6: U1.B5@959.07,98.43 v1(967.89,71.46)
  Mid-Layer 1 w5.5: v1(225.5,-91.85) 205.44,-71.79 cw(c226.38,-50.85) 196.77,-50.85 196.77,33.88 cw(c244.62,33.88) 210.79,67.71 374.27,231.2 cw(c397.5,207.98) 397.5,240.82 519.72,240.82 cw(c519.72,214.25) 538.5,233.04 567.03,204.52 ccw(c592.04,229.53) 592.04,194.16 803.96,194.16 cw(c803.96,172.98) 818.94,187.95 834.13,172.77 cw(c817.91,156.55) 840.85,156.55 840.85,72.05 ccw(c869.04,72.05) 849.1,52.12 863.04,38.18 ccw(c878.08,53.22) 878.08,31.95 918.2,31.95 ccw(c918.2,56.51) 935.57,39.15 v1(967.89,71.46)
  Bottom Layer w5.5: J1.11@62.99,-70.87 122.74,-70.87 cw(c122.74,-80.49) 129.55,-73.69 141.62,-85.76 ccw(c148.43,-78.96) 148.43,-88.58 P4.21@179.13,-88.58 204.84,-88.58 cw(c204.84,-98.21) 206.41,-88.71 v1(225.5,-91.85)
CMOS_RST: C61.2 J1.18 P4.14 R23.1 U1.G8 U8.32 | length 1954
  Top Layer w5.5: v1(1096.86,-118.11) 1117.67,-138.91 ccw(c1124.47,-132.11) 1124.47,-141.73 U8.32@1157.89,-141.73
  Top Layer w6: U1.G8@1077.18,-98.43 v1(1096.86,-118.11)
  Mid-Layer 1 w5.5: v1(-0.26,32.5) 8.41,23.83 cw(c1.61,17.02) 11.23,17.02 11.23,-125.32 ccw(c20.86,-125.32) 14.05,-132.12 170.59,-288.66 170.59,-288.75 184.39,-302.55 ccw(c191.2,-295.75) 191.2,-305.37 920.41,-305.37 ccw(c920.41,-295.75) 927.22,-302.55 1011,-218.77 cw(c1017.81,-225.57) 1017.81,-215.95 1040.95,-215.95 ccw(c1040.95,-206.32) 1047.75,-213.13 1072.83,-188.05 ccw(c1066.02,-181.24) 1075.65,-181.24 1075.65,-143.31 cw(c1085.27,-143.31) 1078.47,-136.5 v1(1096.86,-118.11)
  Bottom Layer w5.5: v1(-0.26,32.5) 24.42,32.5 ccw(c24.42,42.12) 31.27,35.36 33.13,37.24 cw(c39.98,30.48) 39.98,40.11 cw(c39.98,30.48) 40.29,40.1 J1.18@62.99,39.37 85.56,39.37 cw(c85.56,29.75) 92.36,36.55 99.14,29.77 ccw(c105.95,36.58) 105.95,26.95 120.26,26.95 ccw(c120.26,36.58) 127.07,29.77 144.5,47.21 cw(c151.31,40.4) 151.31,50.03 179.09,50.03 P4.14@179.13,49.21 ; R23.1@932.28,-105.57 929.42,-100.73 cw(c936.23,-107.54) 936.23,-97.91 1072.68,-97.91 cw(c1072.68,-107.54) 1079.48,-100.73 v1(1096.86,-118.11) 1060.13,-154.84 C61.2@1059.99,-154.84
CMOS_VD: J1.12 P4.20 U1.G2 U8.21 | length 1447.5
  Top Layer w5.5: U8.21@829.15,-218.5 829.15,-193.03 cw(c838.77,-193.03) 831.97,-186.22 857.46,-160.73 ccw(c850.65,-153.92) 860.28,-153.92 860.28,-79.6 v1(860.5,-79.38)
  Top Layer w6: U1.G2@840.96,-98.43 v1(860.5,-79.38)
  Mid-Layer 1 w5.5: v1(360.94,-144.87) 389.53,-116.28 401.41,-116.28 405.53,-112.15 405.53,-75.78 409.66,-71.66 417.91,-71.66 422.03,-75.78 422.03,-114.43 426.16,-118.56 434.41,-118.56 438.53,-114.43 438.53,-75.81 442.66,-71.69 450.91,-71.69 455.03,-75.81 455.03,-114.99 459.16,-119.12 467.41,-119.12 471.53,-114.99 471.53,-75.61 475.66,-71.49 483.91,-71.49 488.03,-75.61 488.03,-116.32 491.39,-119.68 499.64,-119.68 504.53,-114.79 504.53,-80.62 508.66,-76.49 516.91,-76.49 521.03,-80.62 521.03,-114.39 525.76,-119.12 534.38,-119.12 538.71,-114.78 538.71,-103.36 546.16,-95.91 713.28,-95.91 756.94,-139.57 831.78,-139.57 860.5,-110.85 v1(860.5,-79.38)
  Bottom Layer w5.5: J1.12@62.99,-55.12 128.39,-55.12 cw(c128.39,-64.74) 135.2,-57.94 142.3,-65.04 ccw(c149.1,-58.23) 149.1,-67.86 178.96,-67.86 P4.20@179.13,-68.9 310.58,-68.9 cw(c310.58,-78.53) 317.39,-71.72 358.12,-112.45 cw(c351.31,-119.26) 360.94,-119.26 v1(360.94,-144.87)